# Altium PCB BopIt.PcbDoc
Units mil, origin at the board's own origin, x right, y up, seen from the top; angles counter-clockwise.
Board outline 3100 x 2255 mil, 2 copper layers (Top Layer, Bottom Layer); 35 components, 30 nets, 119 pads, 3 vias.
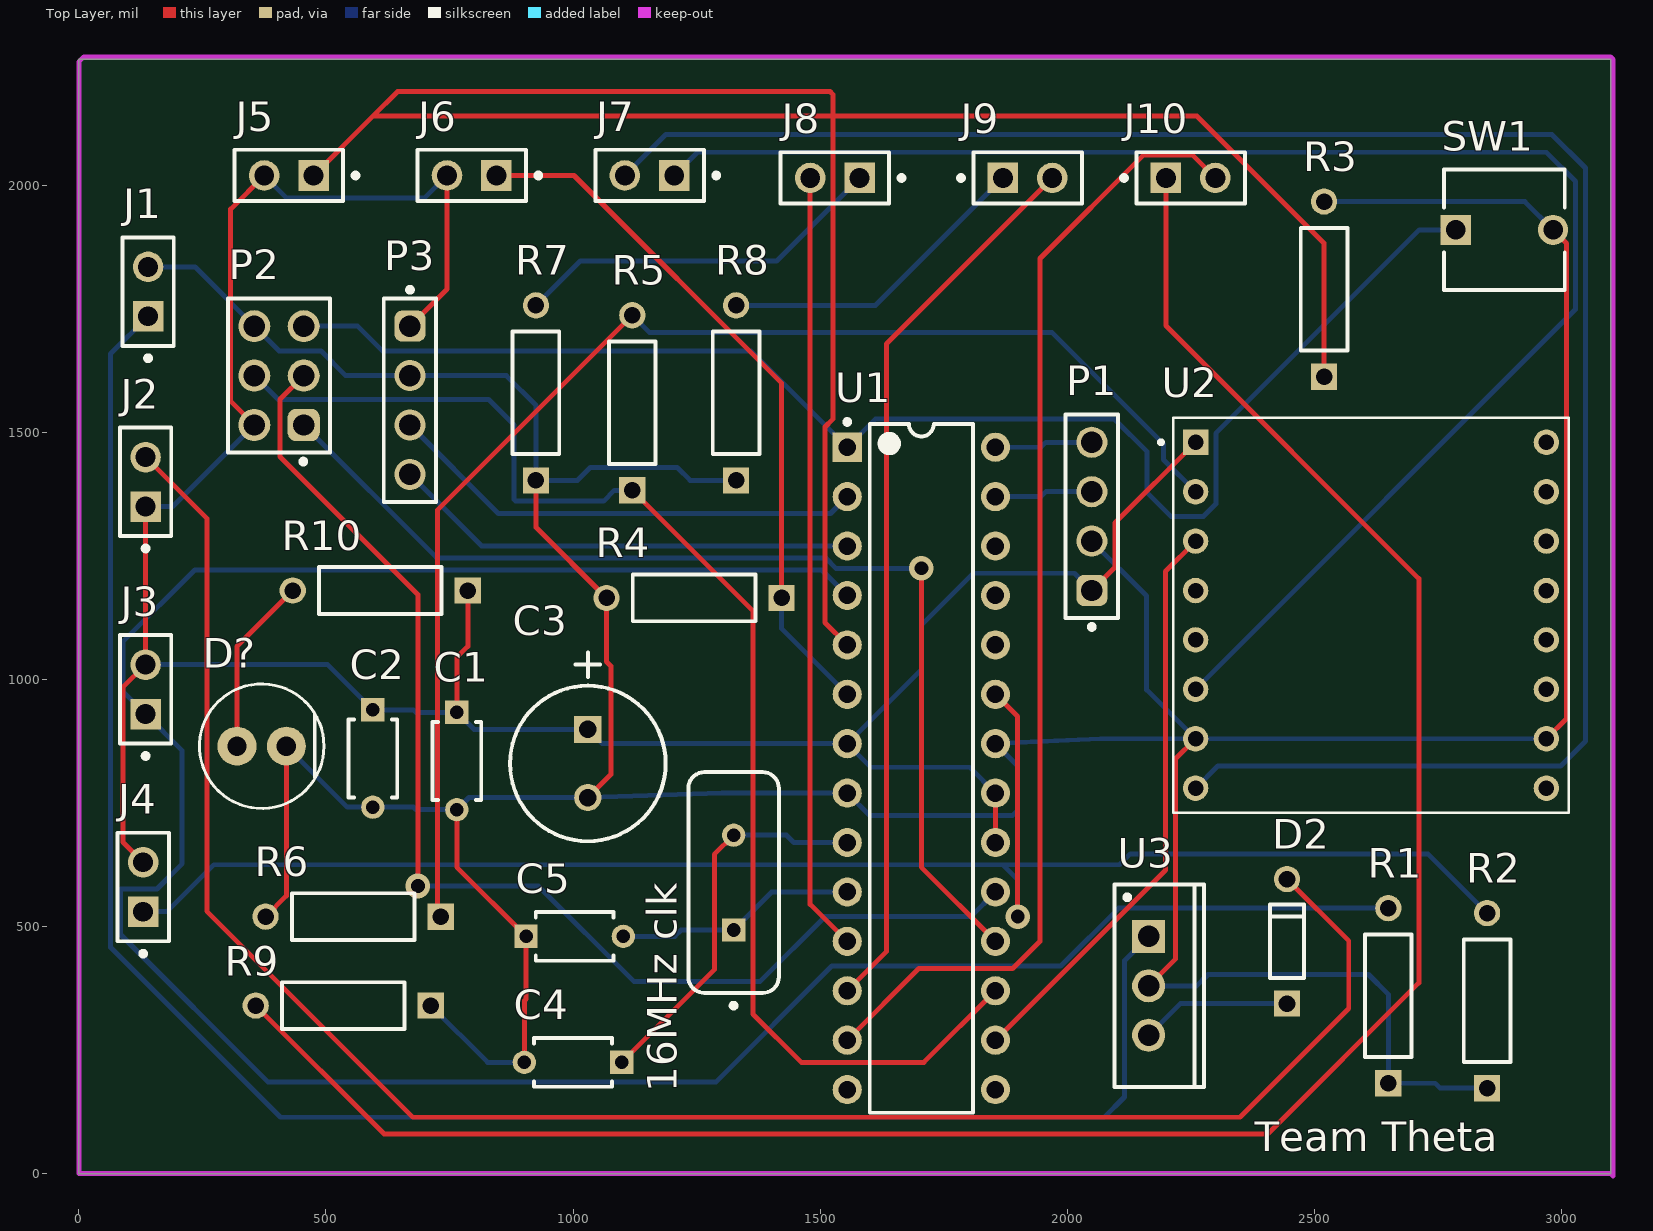
[diagram p0: Top Layer view]
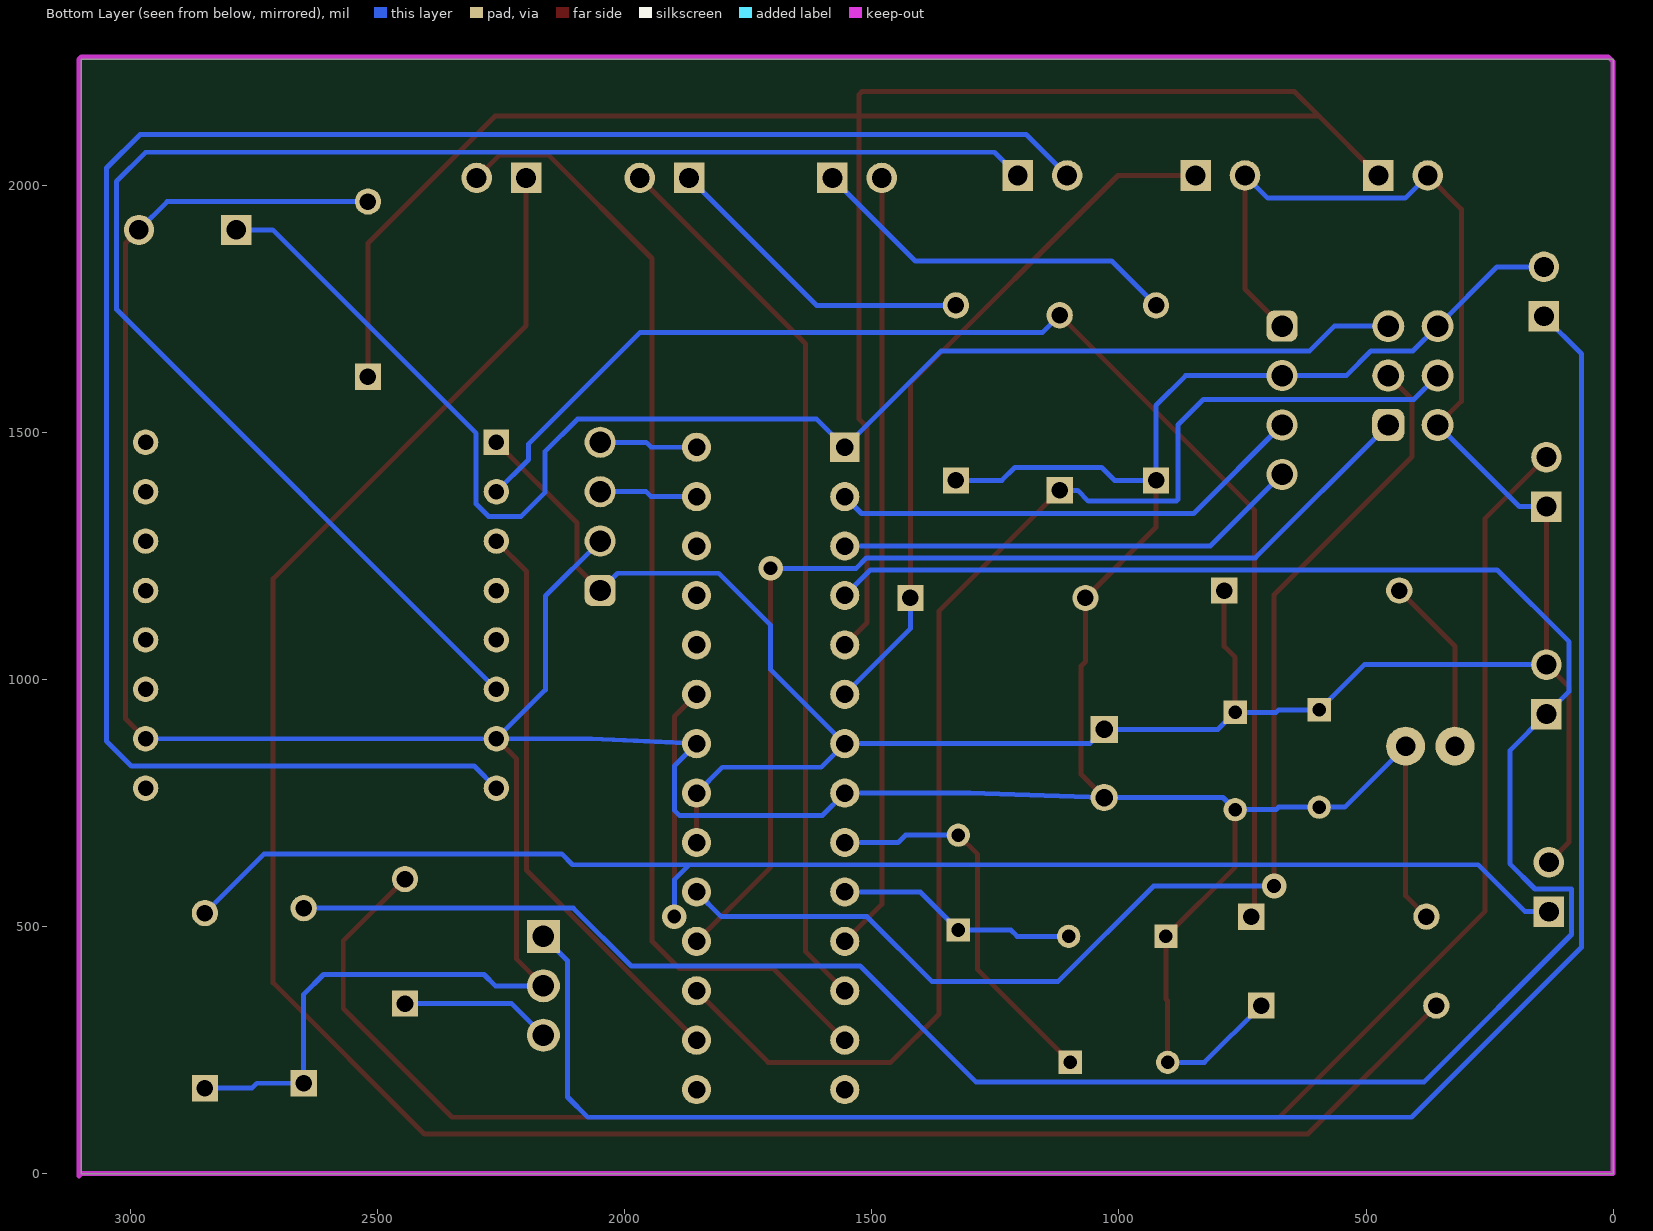
[diagram p1: Bottom Layer view, seen from below]
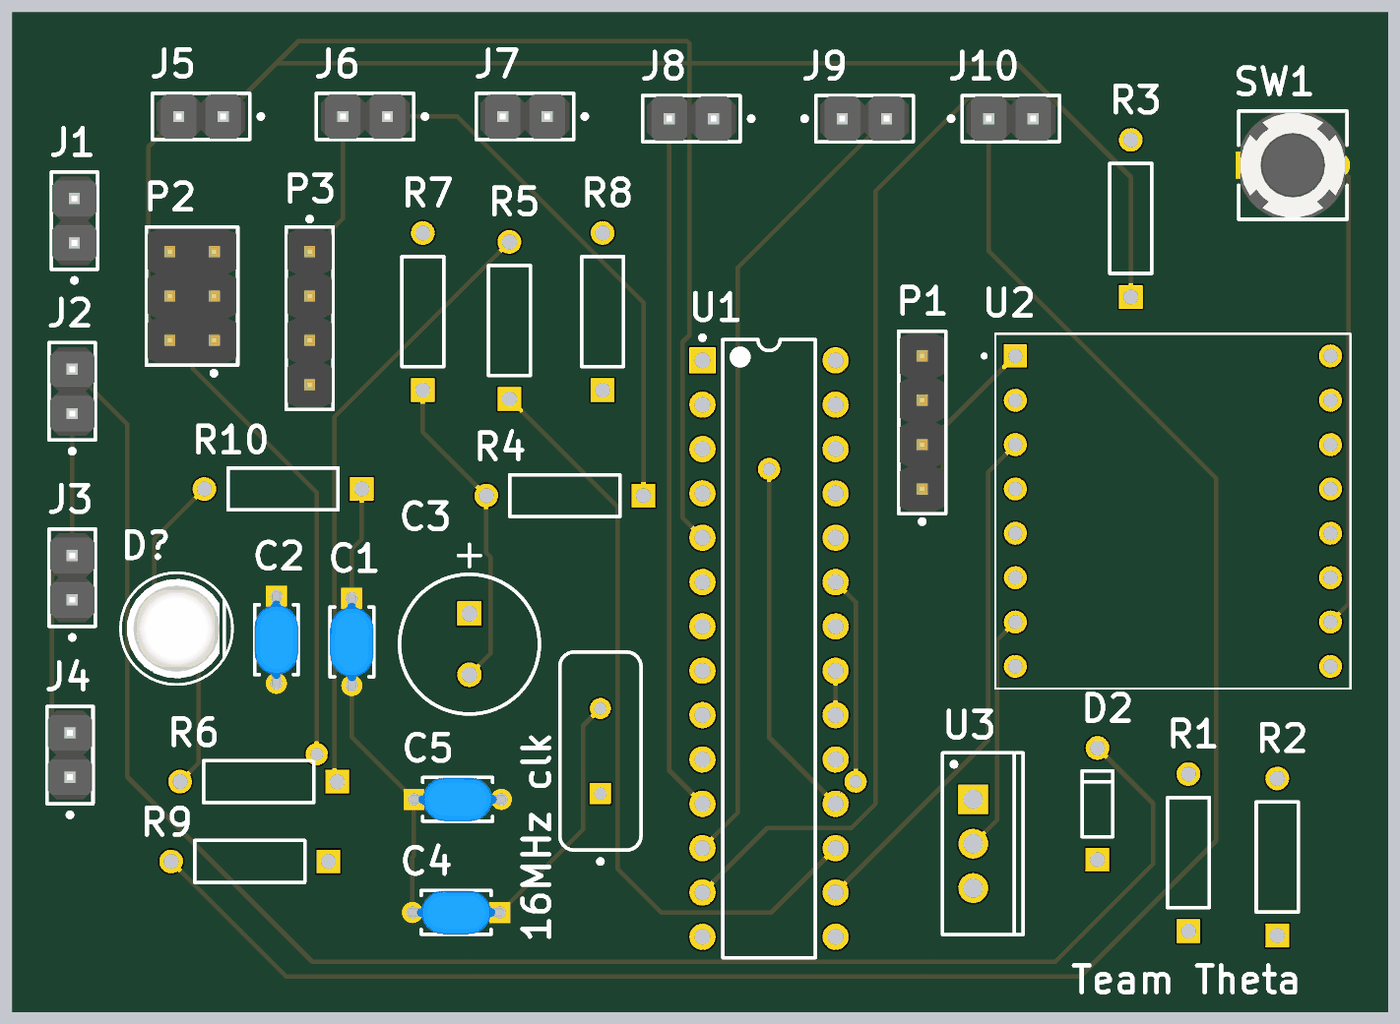
[diagram p2: 3D render of the assembled board from above, using the file's embedded part models]

## Layer stack, top to bottom
Top Solder: solder mask 0.4, Solder Resist, Dk 3.5
Top Layer: signal copper 1.4
Dielectric 1: dielectric 12.6, FR-4, Dk 4.8
Bottom Layer: signal copper 1.4
Bottom Solder: solder mask 0.4, Solder Resist, Dk 3.5

## Board outline
0,0 3100,0 3100,2255 0,2255

## Design rules (kind name [scope] priority, off if disabled: settings)
BoardOutlineClearance [All] p1: gap=7.87 ignorepadtopadclearanceinfootprint=FALSE except(15.75: Arc-SplitBarrior Arc-SplitContinuation Track-SplitBarrior Track-SplitContinuation SMDPad-SplitBarrior SMDPad-SplitContinuation THPad-SplitBarrior THPad-SplitContinuation Via-SplitBarrior Via-SplitContinuation Fill-SplitBarrior Fill-SplitContinuation Poly-SplitBarrior Poly-SplitContinuation Region-SplitBarrior Region-SplitContinuation Text-SplitBarrior Text-SplitContinuation)
Clearance "Clearance Bottom Layer" [OnLayer('Bottom Layer')] p1: gap=8 ignorepadtopadclearanceinfootprint=TRUE except(10: Arc-Text Track-Text SMDPad-Text THPad-Text Via-Text Fill-Text Poly-Text Region-Text Text-Text)
Clearance "Clearance Top Layer" [OnLayer('Top Layer')] p2: gap=8 ignorepadtopadclearanceinfootprint=TRUE except(10: Arc-Text Track-Text SMDPad-Text THPad-Text Via-Text Fill-Text Poly-Text Region-Text Text-Text)
Clearance [All] p3: gap=7.87 ignorepadtopadclearanceinfootprint=FALSE except(3.5: Arc-Arc Arc-Track Arc-SMDPad Track-Track Track-SMDPad SMDPad-SMDPad; 5: Arc-Via Track-Via SMDPad-Via THPad-Via Via-Via; 10: Arc-Text Track-Text SMDPad-Text THPad-Text Via-Text Fill-Text Poly-Text Region-Text Text-Text)
HoleSize [All] p1: absolutevalues=TRUE maxlimit=248.03 minlimit=7.87 maxpercent=80.000 minpercent=20.000
MinimumAnnularRing [All] p1: minimumring=3
MinimumSolderMaskSliver [All] p1: minsoldermaskwidth=3.94
PolygonConnect PolygonConnect_1 [All] p1: thpad.connectstyle=Relief thpad.reliefconductorwidth=20 thpad.reliefentries=4 thpad.polygonreliefangle="90 Angle" thpad.airgapwidth=10 smdpad.connectstyle=Relief smdpad.reliefconductorwidth=20 smdpad.reliefentries=4 smdpad.polygonreliefangle="90 Angle" smdpad.airgapwidth=10 via.connectstyle=Direct via.reliefconductorwidth=20 via.reliefentries=4 via.polygonreliefangle="90 Angle" via.airgapwidth=10
RoutingCorners [All] p1: cornerstyle=Round minsetback=100 maxsetback=100
RoutingVias [All] p1: holewidth=19.68 width=39.37 viastyle="Through Hole" minholewidth=7.87 minwidth=17.72 maxholewidth=39.37 maxwidth=78.74
SilkToSilkClearance [All] p1: silktosilkclearance=3.94
SilkToSolderMaskClearance [IsPad] p1: minsilkscreentomaskgap=3.94 clearancetoexposedcopper=TRUE
SolderMaskExpansion [All] p1: expansion=4 istentingtop=FALSE
SupplyNets "Schematic Supply Nets_1" [InNet('GND')] p1: voltage=0.000
SupplyNets "Schematic Supply Nets" [InNet('VCC')] p2: voltage=0.000
Width [All] p1: maxlimit=100 minlimit=3.5 preferedwidth=15
25 further rules are at their usual default settings.

## Components (designator, comment, footprint, x,y, rotation, side; value= is the part's Value field where it differs from the comment)
"16MHz clk" "" FOX-FOXSLF160-20 1325,588.94 r90 top
C1 "0.1uF" FP-RDE0M1-MFG 765,835 r270 top
C2 "0.1uF" FP-RDE0M1-MFG 595,840 r270 top
C3 "10uF" CAPPR65-350-1150X800X1250 1030,830 r270 top
C4 "0.1uF" FP-RDE0M1-MFG 1000,225 r180 top
C5 "0.1uF" FP-RDE0M1-MFG 1003.43,480 r0 top
D2 "Diode" STM-DO-35-2 2445,470 r90 top
D? "On Indicator LED" FP-SFH_4550-MFG 370,865 r180 top
J1 "Power" FP-M20-9990246-MFG 140,1785 r90 top
J2 "ON/OFF Switch" FP-M20-9990246-MFG 135,1400 r90 top
J3 "Soldering Iron" FP-M20-9990246-MFG 135,980 r90 top
J4 "Multimeter Probes" FP-M20-9990246-MFG 130,580 r90 top
J5 "Code Breakout" FP-M20-9990246-MFG 425,2020 r180 top
J6 "Start Button" FP-M20-9990246-MFG 795,2020 r180 top
J7 "Speaker" FP-M20-9990246-MFG 1155,2020 r180 top
J8 "Solder LED" FP-M20-9990246-MFG 1530,2015 r180 top
J9 "Multimeter LED" FP-M20-9990246-MFG 1920,2015 r0 top
J10 "Code LED" FP-M20-9990246-MFG 2250,2015 r0 top
P1 "LCD" 61300411121 2050,1330 r90 top
P2 "ICSP" 61300621121 405,1615 r90 top
P3 "Serial" 61300411121 670,1565 r270 top
R1 "1k" RESA60-630X240 2650,360 r90 top
R2 "1k" RESA60-630X240 2850,350 r90 top
R3 "1k" RESA60-630X240 2520,1790 r90 top
R4 "1k" RESA60-630X240 1245,1165 r180 top
R5 "680" RESA60-630X240 1120,1560 r90 top
R6 "1k" RESA60-630X240 555,520 r180 top
R7 "470" RESA60-630X240 925,1580 r90 top
R8 "470" RESA60-630X240 1330,1580 r90 top
R9 "470" RESA60-630X240 535,340 r180 top
R10 "1k" RESA60-630X240 610,1180 r180 top
SW1 "Reset" FP-EVQ-11L07K-MFG 2885,1910 r0 top
U1 "ATmega328-PU" 28P3 1705,820 r0 top
U2 "DFR0299" MODULE_DFR0299 2615,1130 r0 top
U3 "5V Regulator" TO220 2165,380 r270 top

## Footprints (in the part's own frame and the unit in brackets; to place one, negate y for a bottom-side part, rotate by r counter-clockwise, add the part's x,y. Pads: shape width x height; smd on the part's side, far side on the other; paste and mask are expansions set on the pad)
28P3 [mm] "28-Pin Plastic Dual In-Line Package (PDIP)"
  rect 1.5x1.5 hole 0.9: 1(-3.81,16.51)
  round 1.5 hole 0.9: 2(-3.81,13.97) 3(-3.81,11.43) 4(-3.81,8.89) 5(-3.81,6.35) 6(-3.81,3.81) 7(-3.81,1.27) 8(-3.81,-1.27) 9(-3.81,-3.81) 10(-3.81,-6.35) 11(-3.81,-8.89) 12(-3.81,-11.43) 13(-3.81,-13.97) 14(-3.81,-16.51) 15(3.81,-16.51) 16(3.81,-13.97) 17(3.81,-11.43) 18(3.81,-8.89) 19(3.81,-6.35) 20(3.81,-3.81) 21(3.81,-1.27) 22(3.81,1.27) 23(3.81,3.81) 24(3.81,6.35) 25(3.81,8.89) 26(3.81,11.43) 27(3.81,13.97) 28(3.81,16.51)
  silkscreen extent -3.93,-17.7 2.65,17.93, body extent -3.6,-17.65 3.6,17.65, height 4.58
61300411121 [mm] "Pin Header, pitch 2.54 mm, THT, Vertical, single row, 4p"
  rrect50% 1.6x1.6 hole 1.1: 1(-3.81,0)
  round 1.6 hole 1.1: 2(-1.27,0) 3(1.27,0) 4(3.81,0)
  silkscreen extent -5.8,-1.34 5.23,1.34, body extent -5.08,-1.27 5.08,1.27, height 8.57
61300621121 [mm] "Pin Header, pitch 2.54 mm, THT, Vertical, dual row, 6p"
  rrect50% 1.65x1.65 hole 1.1: 1(-2.54,-1.27)
  round 1.65 hole 1.1: 2(-2.54,1.27) 3(0,-1.27) 4(0,1.27) 5(2.54,-1.27) 6(2.54,1.27)
  silkscreen extent -4.54,-2.61 3.96,2.61, body extent -3.81,-2.54 3.81,2.54, height 8.59
CAPPR65-350-1150X800X1250 [mm] "THD, 2-Leads, Dia 8mm, Body 11.5mm"
  rect 1.4x1.4 hole 0.9: 1(-1.75,0)
  round 1.4 hole 0.9: 2(1.75,0)
  silkscreen extent -5.71,-4 4,4, body extent -4,-4 4,4, height 12.5
FOX-FOXSLF160-20 [mm] "THD, 2-Leads, Body 11.35x4.65mm"
  rect 1.2x1.2 hole 0.7: 1(-2.44,0)
  round 1.2 hole 0.7: 2(2.44,0)
  silkscreen extent -6.45,-2.33 5.68,2.33, body extent -5.67,-2.32 5.68,2.33, height 3.6
FP-EVQ-11L07K-MFG [mm]
  rect 1.55x1.55 hole 1 paste-2539.97 mask+0: A(-2.5,0)
  round 1.55 hole 1 paste-2539.97 mask+0: B(2.5,0)
  silkscreen extent -3.1,-3.1 3.1,3.1, body extent -3.37,-3.2 3.37,3.2, height 0.25
FP-M20-9990246-MFG [mm]
  rect 1.57x1.57 hole 1.02 paste-2539.97 mask+0: 1(-1.27,0)
  round 1.57 hole 1.02 paste-2539.97 mask+0: 2(1.27,0)
  silkscreen extent -3.55,-1.32 2.79,1.32, body extent -2.89,-1.42 2.89,1.42, height 0.25
FP-RDE0M1-MFG [mm]
  rect 1.2x1.2 hole 0.7 paste-2539.97 mask+0: 1(-2.5,0)
  round 1.2 hole 0.7 paste-2539.97 mask+0: 2(2.5,0)
  silkscreen extent -2,-1.25 2,1.25, body extent -3.2,-1.35 3.2,1.35, height 0.25
FP-SFH_4550-MFG [mm]
  round 2 hole 1 paste-2539.97 mask+0: 1(-1.27,0) 2(1.27,0)
  silkscreen extent -3.2,-3.2 3.2,3.2, body extent -3.05,-3.05 3.05,3.05, height 0.25
MODULE_DFR0299 [mil]
  rect 51.5x51.5 hole 31.5: 1(-355,350)
  round 51.5 hole 31.5: 2(-355,250) 3(-355,150) 4(-355,50) 5(-355,-50) 6(-355,-150) 7(-355,-250) 8(-355,-350) 9(355,-350) 10(355,-250) 11(355,-150) 12(355,-50) 13(355,50) 14(355,150) 15(355,250) 16(355,350)
  silkscreen extent -429,-400 400,400
RESA60-630X240 [mm] "Axial Resistor, 2-Leads, Dia 2.4mm, Body Length 6.3mm"
  rect 1.35x1.35 hole 0.85: 1(-4.5,0)
  round 1.35 hole 0.85: 2(4.5,0)
  silkscreen extent -3.15,-1.2 3.15,1.2, body extent -3.15,-1.2 3.15,1.2, height 2.4
STM-DO-35-2 [mm] "THD, 2-Leads, Dia 1.765 mm, Body Length 3.775 mm"
  rect 1.35x1.35 hole 0.85: 1(-3.2,0)
  round 1.35 hole 0.85: 2(3.2,0)
  silkscreen extent -1.89,-0.88 1.89,0.88, body extent -1.89,-0.88 1.89,0.88, height 1.76
TO220 [mm] "TO, Thru-Hole, Vertical, Heatsink Mounted; 3 In-Line Leads; Pitch 2.54 mm"
  rect 1.7x1.7 hole 1.1: 1(-2.54,0)
  round 1.7 hole 1.1: 2(0,0) 3(2.54,0)
  silkscreen extent -5.2,-1.75 5.2,2.85, body extent -5.25,-1.8 5.25,2.9, height 19.7

## Part data
"16MHz clk": library part CMP-1749-00003-1, "Resistance Weld Thru-Hole Crystal, 16 MHz, -20 to 70 degC, 2-Pin THD, RoHS, Bulk", Case\Package=Axial, Max Operating Temperature="155 degC", Min Operating Temperature="-55 degC", Package Quantity=200, Power Rating="250 mW", Resistance="221 kohm", Tolerance=1%, Voltage Rating="250 V", ComponentLink1Description="Manufacturer URL", ComponentLink1URL=http://www.foxonline.com/, ComponentLink2Description=Datasheet, ComponentLink2URL=http://www.foxonline.com/pdfs/hc49slf.pdf, DatasheetVersion=Mar-15, Length="0.248 inch", Mount="Through Hole", PackageDescription="2-Pin Through Hole Device, Body 11.35 x 4.65 mm", PackageReference=FOXSLF160-20, Packaging=Bulk, RoHSCompliant=true
C1 C2 C4 C5: library part CMP-06035-043024-1, "Ceramic Capacitor 10nF ±10% 50V X7R Radial", Capacitance=10nF, Case/Package=Radial, Dielectric=X7R, Max Operating Temperature=125°C, Min Operating Temperature=-55°C, Package Quantity=500, Resistor Type=Ceramic, Tolerance=10%, Voltage Rating=50V, Height=3.5mm, Height - Seated (Max)=0.236inch, Lead Diameter=0.5mm, Lead Free="Lead Free", Lead Pitch=0.197inch, Lead/Base Style=Kinked, Length=0.157inch, Mount="Through Hole", Packaging=Bulk, Termination=Radial, Voltage Rating (DC)=50V, Width=0.098inch
C3: library part CMP-1665-00041-1, "Aluminum Electrolytic Capacitor, 47 uF, +/- 20%, 100 V, -40 to 85 degC, 2-Pin THD, RoHS, Bulk", Case\Package=QFN, Max Operating Temperature="70 degC", Min Operating Temperature="-20 degC", Nominal Supply Voltage="3.3 V", Package Quantity=500, ComponentLink1Description="Manufacturer URL", ComponentLink1URL=http://www.panasonic.com/, ComponentLink2Description=Datasheet, ComponentLink2URL=http://industrial.panasonic.com/cdbs/www-data/pdf/RDF0000/ABA0000C1047.pdf, Data Rate="54 mbps", DatasheetVersion=Mar-16, Length="7.7 mm", Mount="Surface Mount", PackageDescription="2-Pin Radial Lead, Dia 8 mm, Body Length 11.5 mm", PackageReference=CAPPR65-350-1150X800X1250, Packaging="Tape and Reel", Pins=48, Radiation Hardening=No, RoHSCompliant=true
D2: library part CMP-2000-05926-1, "Small Signal Schottky Diode, 150 mA, 100 V, -65 to 125 degC, 2-Pin DO-35, RoHS, Tape and Reel", Diode Case Style=DO-204AH, Forward Current If(AV)=150mA, Forward Surge Current Ifsm Max=750mA, Forward Voltage VF Max=1V, Manufacturer=STMicroelectronics, Operating Temperature Max=125°C, Package Description="2-Pin Axial Lead, Dia 1.765 mm, Body Length 3.775 mm", Package Reference=DO-35-2, Repetitive Reverse Voltage Vrrm Max=100V, Datasheet URL=http://www.st.com/content/ccc/resource/technical/document/datasheet/group1/11/76/e4/a3/df/07/49/14/CD00000767/files/CD00000767.pdf/jcr:content/translations/en.CD00000767.pdf, Datasheet Version="Rev. 2.1, 10/2001", Diode Configuration=Single, Diode Type=Schottky, Manufacturer URL=http://www.st.com/, Mounting Technology=ThroughHole, No. of Pins=2Pins, Packaging=Tape&Reel, Product Range=-, SVHC=NoSVHC(15-Jun-2015)
D?: library part CMP-62016-000011-1, "EMITTER IR 860NM 100MA RADIAL", Colour=Infrared, Forward Current=100mA, Forward Voltage=1.5V, Manufacturer="Osram Opto", Manufacturer Part Number="SFH 4550", Reverse Voltage=5V, Temperature="-40°C to +100°C", Temperature Range High=+100°C, Temperature Range Low=-40°C, Automotive=No, Category=Diode, ComponentLink2Description=Datasheet, ComponentLink2URL=https://dammedia.osram.info/media/resource/hires/osram-dam-5580407/SFH%204550_EN.pdf, Device Class L1=Optoelectronics, Device Class L2=LEDs, Device Class L3=unset, Digikey Description="EMITTER IR 860NM 100MA RADIAL", Lead Free=Yes, Led Orientation=Straight, Mouser Description="Infrared Emitters - High Power Infrared 850 nm HALF ANGLE +/-3DEG", Octopart=https://octopart.com/sfh+4550-osram+opto-55410894, Package="SFH 4550", Peak Emmision Wavelength=860nm, RoHS=TRUE, Viewing Angle=6°
J1 J2 J3 J4 J5 J6 J7 J8 J9 J10: library part CMP-15831-000009-1, "CONN HEADER VERT 2POS 2.54MM", Current Rating=3A, Manufacturer=Harwin, Manufacturer Part Number=M20-9990246, Temperature="-40°C to +105°C", Temperature Range High=+105°C, Temperature Range Low=-40°C, Automotive=No, Category=Conn, ComponentLink2Description=Datasheet, ComponentLink2URL=https://cdn.harwin.com/pdfs/M20-999.pdf, Conn Gender=Male, Conn Orientation=Vertical, Contact Material=Tin,Nickel, Device Class L1=Connectors, Device Class L2="Headers and Wire Housings", Device Class L3=unset, Digikey Description="CONN HEADER VERT 2POS 2.54MM", Height=8.99mm, Lead Free=Yes, Mouser Description="2.54mm (0.1\") Pitch SIL Vertical PC Tail Pin Header, 6.1mm mating pin height, tin, 2 contacts", Number Of Contacts=2, Number Of Rows=1, Octopart=https://octopart.com/m20-9990246-harwin-2590635, Package=M20-9990246, Pitch=2.54mm, RoHS=TRUE
P1 P3: library part CMP-1502-01064-3, Color=Black, Contact Resistance=20mΩ, Current Rating=3A, Max Operating Temperature=105°C, Min Operating Temperature=-40°C, Operating Supply Voltage=250V, Connector Type="Male Pin", Contact Material=Copper, Contact Mating Length=5.9944mm, Contact Plating=Gold, Gender=Male, Height=8.89mm, Lead Free="Lead Free", Lead Pitch=2.54mm, Mount="Through Hole", NexarPartId=32855522, Number Of Contacts=4, Number of Pins=4, Number of Positions=4, Number Of Rows=1, Orientation=Vertical, Packaging=Bulk, Pitch=2.54mm, REACH SVHC=Unknown, RoHS=Compliant, Termination=Solder, Voltage Rating=250V
P2: library part CMP-1502-01072-3, Color=Black, Contact Resistance=20mΩ, Current Rating=3A, Max Operating Temperature=105°C, Min Operating Temperature=-40°C, Operating Supply Voltage=250V, Connector Type="Male Pin", Contact Material=Copper, Contact Mating Length=5.9944mm, Contact Plating=Gold, Gender=Male, Height=8.89mm, Lead Pitch=2.54mm, Mount="Through Hole", NexarPartId=32855529, Number Of Contacts=6, Number of Pins=6, Number of Positions=6, Number Of Rows=2, Orientation=Vertical, Packaging=Bulk, Pitch=2.54mm, REACH SVHC=Unknown, RoHS=Compliant, Row Spacing=2.54mm, Termination=Solder, Voltage Rating=250V
R1 R2 R3 R4 R5 R6 R7 R8 R9 R10: library part CMP-1659-00067-1, "Axial Resistor, 47.5 Ohm, +/- 1%, 0.25 W, -55 to 155 degC, 2-Pin THD, RoHS, Bulk", Case\Package=SOIC, Max Operating Temperature="85 degC", Max Supply Voltage="5 V", Min Operating Temperature="-40 degC", Min Supply Voltage="3 V", Nominal Supply Current="170 uA", Nominal Voltage Gain="100 dB", Output Current="160 mA", Package Quantity=2500, Bandwidth="1 MHz", Channels=4, Common Mode Rejection Ratio="50 dB", ComponentLink1Description="Manufacturer URL", ComponentLink1URL=http://www.yageo.com/, ComponentLink2Description=Datasheet, ComponentLink2URL=http://www.yageo.com/documents/recent/Yageo%20LR_MFR_2013.pdf, DatasheetVersion=Apr-13, Height="1.58 mm", Length="8.65 mm", Mount="Surface Mount", Nominal Gain Bandwith Product="1 MHz", PackageDescription="2-Pin Axial Lead, Dia 2.4 mm, Body Length 6.3 mm", PackageReference=MFR-25, Packaging="Tape and Reel", Pins=14, Radiation Hardening=No, REACH SVHC="No SVHC", RoHSCompliant=true, Slew Rate="1 V\us", Unity Gain Bandwidth Product="1 MHz", Width="3.91 mm"
SW1: library part CMP-00287-55397191-1, "EVQ-11L07K Switch Tactile N.O. SPST Round Button PC Pins 0.02A 15VDC 1.6N Thru-Hole Radial T/R", Case/Package=Radial, Contact Current Rating=20mA, Contact Resistance=50mΩ, Max Operating Temperature=70°C, Max Voltage Rating (DC)=15V, Min Operating Temperature=-20°C, Operating Force=1.6N, Actuator Length=3.1mm, Current Rating=20mA, Electrical Life=100kcycles, Height=3.9mm, Illumination Type="Illuminated, Non-Illuminated", Lead Free="Lead Free", Length=6mm, Life (Cycles)=100kcycles, Mechanical Life=100kcycles, Mount="Through Hole", NexarPartId=55397191, Number of Pins=2, Number of Positions=2, Orientation=Straight, Radiation Hardening=No, REACH SVHC=Unknown, RoHS=Compliant, Switch Function=Off-Mom, Switch Travel=250µm, Termination="PC Pin", Throw Configuration=SPST, Voltage Rating (DC)=15V, Width=6mm
U1: library part CMP-0095-00015-2, "8-bit AVR Microcontroller, 32KB Flash, 1KB EEPROM, 2KB SRAM, 28-pin PDIP, Industrial Grade (-40°C to 85°C)", ComponentLink1Description="Manufacturer URL", ComponentLink1URL=http://www.atmel.com/, ComponentLink2Description="ATmega48A/48PA/88A/88PA/168A/168PA/328/328P Datasheet", ComponentLink2URL=http://www.atmel.com/dyn/resources/prod_documents/8271.pdf, ComponentLink3Description="ATmega48A/48PA/88A/88PA/168A/168PA/328/328P Summary", ComponentLink3URL=http://www.atmel.com/dyn/resources/prod_documents/8271S.pdf, DatasheetVersion="revD, May-2011", PackageDescription="28-lead (0.300\"/7.62mm Wide) Plastic Dual Inline Package (PDIP)", PackageReference=28P3, PackageVersion="revB, Sep-2001", RevisionNote="DatasheetVersion updated. URLs added."
U2: library part CMP-153-000000-1, "Dfplayer - a Mini Mp3 Player", Package=None, Availability=Unavailable, Component Type=Standard, Design Item ID=DFR0299, MP=DFR0299, Pin Count=16, Price=None, Source=DFR0299.SchLib
U3: library part CMP-0244-00484-1, "Positive Voltage Regulator, 5V, 3-Pin TO-220", ComponentLink1Description="Manufacturer URL", ComponentLink1URL=http://www.st.com, ComponentLink2Description=Datasheet, ComponentLink2URL=http://www.st.com/internet/com/TECHNICAL_RESOURCES/TECHNICAL_LITERATURE/DATASHEET/CD00000444.pdf, ComponentLink3Description="Package Specification", ComponentLink3URL=http://www.st.com/internet/com/TECHNICAL_RESOURCES/TECHNICAL_LITERATURE/PACKAGE_INFORMATION/CD00004649.pdf, DatasheetVersion=16/11/2011, PackageDescription="TO, Thru-Hole, Vertical, Heatsink Mounted; 3 In-Line Leads; Pitch 2.54 mm", PackageReference=TO220, PackageVersion=ver3.0

## Via types
v1: diameter 50, hole 28, Top Layer to Bottom Layer, 3 vias

## Nets (pads, with @x,y where several pads share a name; then routed paths per layer and width w, separated by ;. In a path a pad name is that pad's centre, name@x,y a point inside that pad or via, vN(x,y) a via of type N, cw(c..) or ccw(c..) an arc to the next point about the centre after c; other vN are vias at no path point)
GND: C1.2 C2.2 C3.2 C4.2 C5.1 D?.1 J1.2 P1.2 P2.6 P3.2 R1.1 R2.1 R3.2 R4.2 R6.2 R7.1 R8.1 R9.1 SW1.B U1.8 U1.22 U2.7 U2.10 U3.2 | length 9676.9
  Top Layer w10: R6.2 420,562.17 D?.1 ; C1.2 765,620 C5.1 905,353.43 901.57,350 C4.2 ; R7.1 925,1307.83 R4.2 1067.83,1036.17 1077,1027 1077,808.1 C3.2 ; U3.2 2219,434 2219,839 U2.7 ; U2.10 3011,921 3011,1882.43 SW1.B
  Bottom Layer w10: J1.2 235,1835 P2.6 405,1665 490,1665 540,1615 P3.2 865,1615 925,1555 R7.1 1009,1402.83 1035.17,1429 1211,1429 1237.17,1402.83 R8.1 ; D?.1 543.43,741.57 C2.2 677,741.57 682,736.57 C1.2 789.53,761.1 C3.2 1301.9,770 U1.8 1600,725 1890,725 1900,735 1900,825 U1.22 2068,880 U2.7 ; R9.1 827.17,225 C4.2 ; P1.2 2161,1169 2161,979 U2.7 ; U3.2 2262,380 2285,403 2610,403 2650,363 R1.1 2745,182.83 2755,172.83 R2.1 ; R3.2 2926.26,1967.17 SW1.B ; U2.10 U2.7
"Net16MHz clk_1": "16MHz clk.1" C5.2 U1.10 | length 490.4
  Bottom Layer w10: C5.2 1206,480 1218.87,492.87 1325,492.87 1402.13,570 U1.10
"Net16MHz clk_2": "16MHz clk.2" C4.1 U1.9 | length 790.1
  Top Layer w10: C4.1 1286,412.57 1286,646 1325,685
  Bottom Layer w10: 1325,685 1432,685 1447,670 U1.9
NetD2_1: D2.1 U3.3 | length 306.5
  Bottom Layer w10: U3.3 2229.02,344.02 D2.1
NetD2_2: D2.2 J2.2 | length 3859
  Top Layer w10: J2.2 259,1326 259,531 676,114 2350,114 2570,334 2570,470.98 D2.2
NetD?_2: D?.2 R10.2 | length 361.7
  Top Layer w10: D?.2 320,1067.17 R10.2
NetJ1_1: J1.1 U3.1 | length 3865.2
  Bottom Layer w10: J1.1 64.09,1659.09 64.09,457.91 408,114 2075,114 2116,155 2116,431 U3.1
NetJ3_1: J3.1 R1.2 U1.4 | length 5120.4
  Bottom Layer w10: U1.4 1503,1222 235,1222 89,1076 89,976 J3.1 209,856 209,627 158,576 84.09,576 84.09,484 383.09,185 1289,185 1524,420 1987,420 2104.17,537.17 R1.2
NetJ4_1: J4.1 R2.2 U1.23 | length 3404.2
  Top Layer w10: U1.23 1900,925 v1(1900,520)
  Bottom Layer w10: J4.1 178,530 273,625 1870,625 ; v1(1900,520) 1900,595 1870,625 ; R2.2 2730.17,647 2128,647 2106,625 1870,625
NetJ5_1: J5.1 R3.1 U1.5 | length 4564.9
  Top Layer w10: J5.1 595,2140 ; U1.5 1510,1115 1510,1511 1526,1527 1526,2140 ; R3.1 2520,1883 2263,2140 1526,2140 ; 595,2140 645,2190 1520.14,2190 1526,2184.14 1526,2140 ; 595,2140 1526,2140
NetJ6_1: J6.1 R4.1 U1.6 | length 1436.1
  Top Layer w10: J6.1 1002,2020 1422.17,1599.83 R4.1
  Bottom Layer w10: R4.1 1422.17,1102.83 U1.6
NetJ7_1: J7.1 U2.6 | length 3214.4
  Bottom Layer w10: J7.1 1252,2067 2970,2067 3029,2008 3029,1749 U2.6
NetJ7_2: J7.2 U2.8 | length 3994.9
  Bottom Layer w10: J7.2 1188,2103 2981,2103 3049,2035 3049,875 2999,825 2305,825 U2.8
NetJ8_1: J8.1 R7.2 | length 761.8
  Bottom Layer w10: R7.2 1014.83,1847 1412,1847 J8.1
NetJ8_2: J8.2 U1.11 | length 1576.1
  Top Layer w10: J8.2 1480,545 U1.11
NetJ9_1: J9.1 R8.2 | length 646.8
  Bottom Layer w10: R8.2 1612.17,1757.17 J9.1
NetJ9_2: J9.2 U1.12 | length 1816.9
  Top Layer w10: U1.12 1634.06,449.06 1634.06,1679.06 J9.2
NetJ10_1: J10.1 R9.2 | length 4429.7
  Top Layer w10: R9.2 617.83,80 2406,80 2712,386 2712,1204 2200,1716 J10.1
NetJ10_2: J10.2 U1.13 | length 2315.5
  Top Layer w10: U1.13 1700,415 1890,415 1945,470 1945,1852 2154,2061 2254,2061 J10.2
NetP1_3: P1.3 U1.27 | length 199.1
  Bottom Layer w10: U1.27 1947,1370 1957,1380 P1.3
NetP1_4: P1.4 U1.28 | length 199.1
  Bottom Layer w10: U1.28 1947,1470 1957,1480 P1.4
NetP2_1: P2.1 U1.18 | length 2187.3
  Top Layer w10: v1(1705,1225) 1705,620 U1.18
  Bottom Layer w10: P2.1 724,1246 1511,1246 1532,1225 v1(1705,1225)
NetP2_3: P2.3 U1.19 | length 2492.4
  Top Layer w10: P2.3 407,1567 407,1451 686,1172 v1(686,582)
  Bottom Layer w10: v1(686,582) 930,582 1123,389 1379,389 1510,520 1805,520 U1.19
NetP2_4: P2.4 R5.1 U1.17 | length 2720.3
  Top Layer w10: R5.1 1364,1138.83 1364,323 1462,225 1710,225 U1.17
  Bottom Layer w10: P2.4 403,1567 829,1567 881,1515 881,1364 884,1361 1062,1361 1083.83,1382.83 R5.1
NetP2_5: P2.5 SW1.A U1.1 | length 2910.9
  Bottom Layer w10: P2.5 564,1715 614,1665 1360,1665 U1.1 1612,1527 2096,1527 2162,1461 2162,1378 2210,1330 2276,1330 2301,1355 2301,1498 2713,1910 SW1.A
NetP3_3: P3.3 U1.2 | length 973.2
  Bottom Layer w10: P3.3 849,1336 1521,1336 U1.2
NetP3_4: P3.4 U1.3 | length 945.1
  Bottom Layer w10: P3.4 815,1270 U1.3
NetR5_2: R5.2 R6.1 U2.2 | length 2693.2
  Top Layer w10: R6.1 726,520 726,1343.17 R5.2
  Bottom Layer w10: R5.2 1155.17,1702 1969.96,1702 2194.87,1477.09 2194.87,1445.13 U2.2
NetU1_16: U1.16 U2.3 | length 1177.8
  Top Layer w10: U1.16 2199,614 2199,1219 U2.3
VCC: C1.1 C2.1 C3.1 J2.1 J3.2 J4.2 J5.2 J6.2 P1.1 P2.2 P3.1 R10.1 U1.7 U1.20 U1.21 U2.1 | length 5617.2
  Top Layer w10: J4.2 89,671 89,984 J3.2 J2.1 ; P2.2 307,1563 307,1952 J5.2 ; P3.1 745,1790 J6.2 ; C1.1 765,1045 787.17,1067.17 R10.1 ; U1.20 U1.21 ; P1.1 2097,1227 2097,1317 U2.1
  Bottom Layer w10: J3.2 503.43,1030 C2.1 677,938.43 682,933.43 C1.1 799.53,898.9 C3.1 1058.9,870 U1.7 ; J2.1 190,1350 P2.2 ; J5.2 421,1974 699,1974 J6.2 ; U1.21 1802.69,822.31 1602.69,822.31 U1.7 ; P1.1 2015,1215 1810,1215 1705,1110 1705,1020 U1.7
pads on no net: U1.14 U1.15 U1.24 U1.25 U1.26 U2.4 U2.5 U2.9 U2.11 U2.12 U2.13 U2.14 U2.15 U2.16

## Keep-outs
Keep-Out Layer:
  lines w10: 0,0 3100,0 3105,-5 3105,2255 3100,2260 10,2260 0,2250 0,0

## Silkscreen, mask and mechanical layers (free items; w line width, h text height)
Top Overlay:
  text "Team Theta" at 2380,45 h60